# EAGLE board UV - SERVO_CTRL - Copy (2) (EAGLE 6.3)
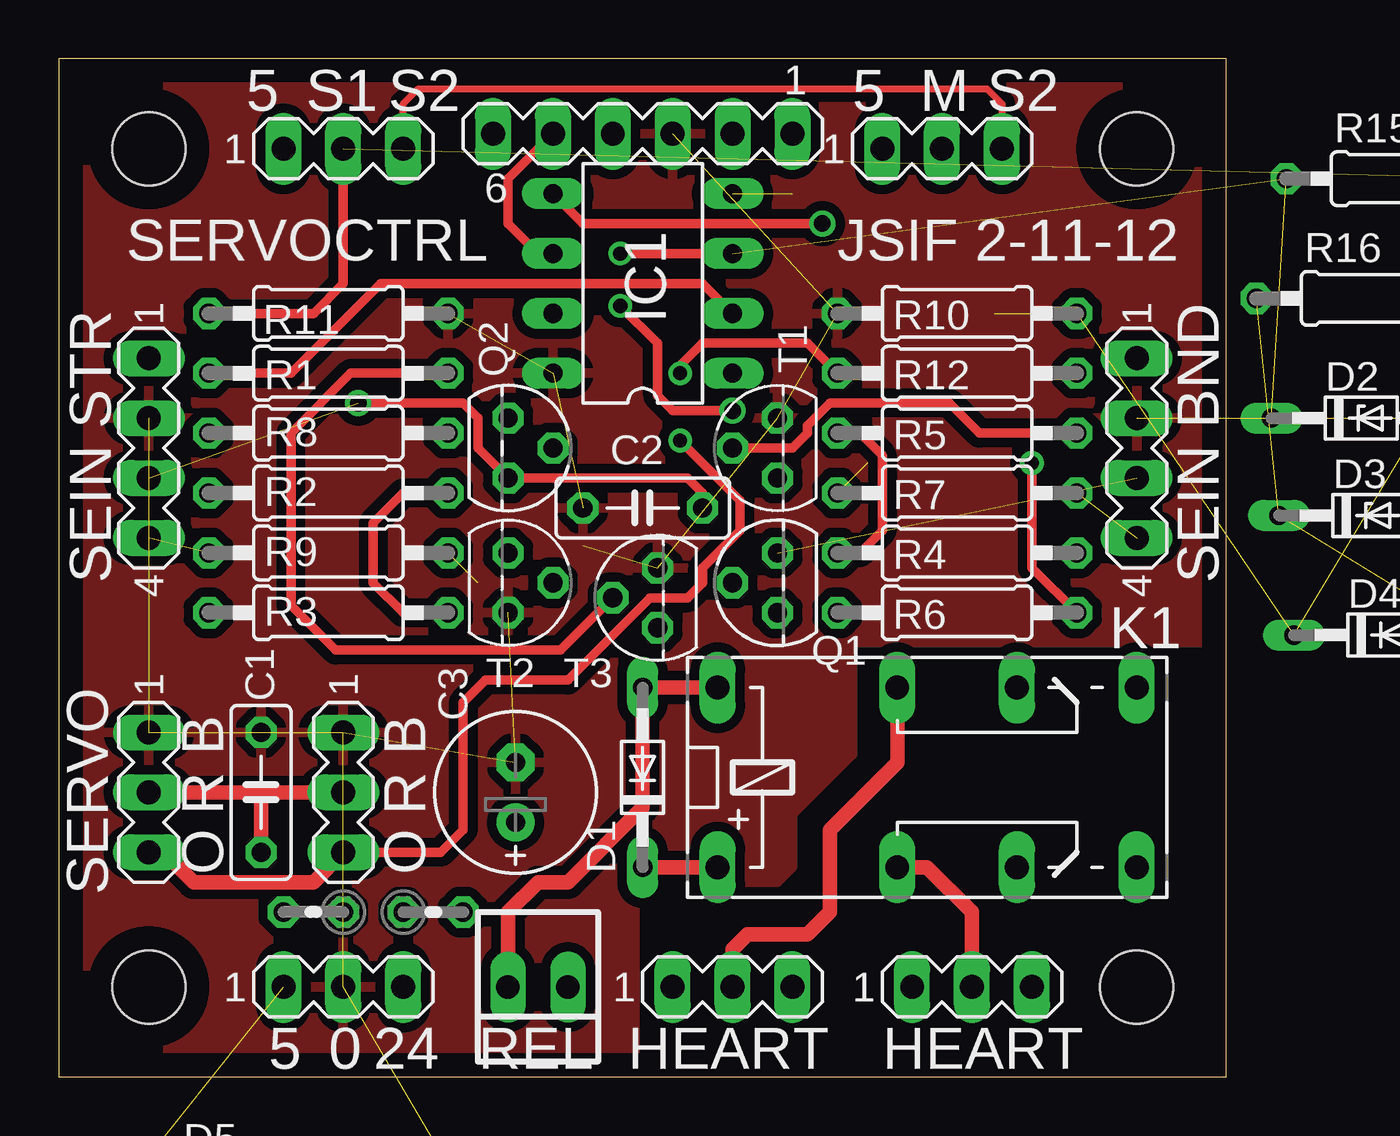
[diagram p0: board, top side]
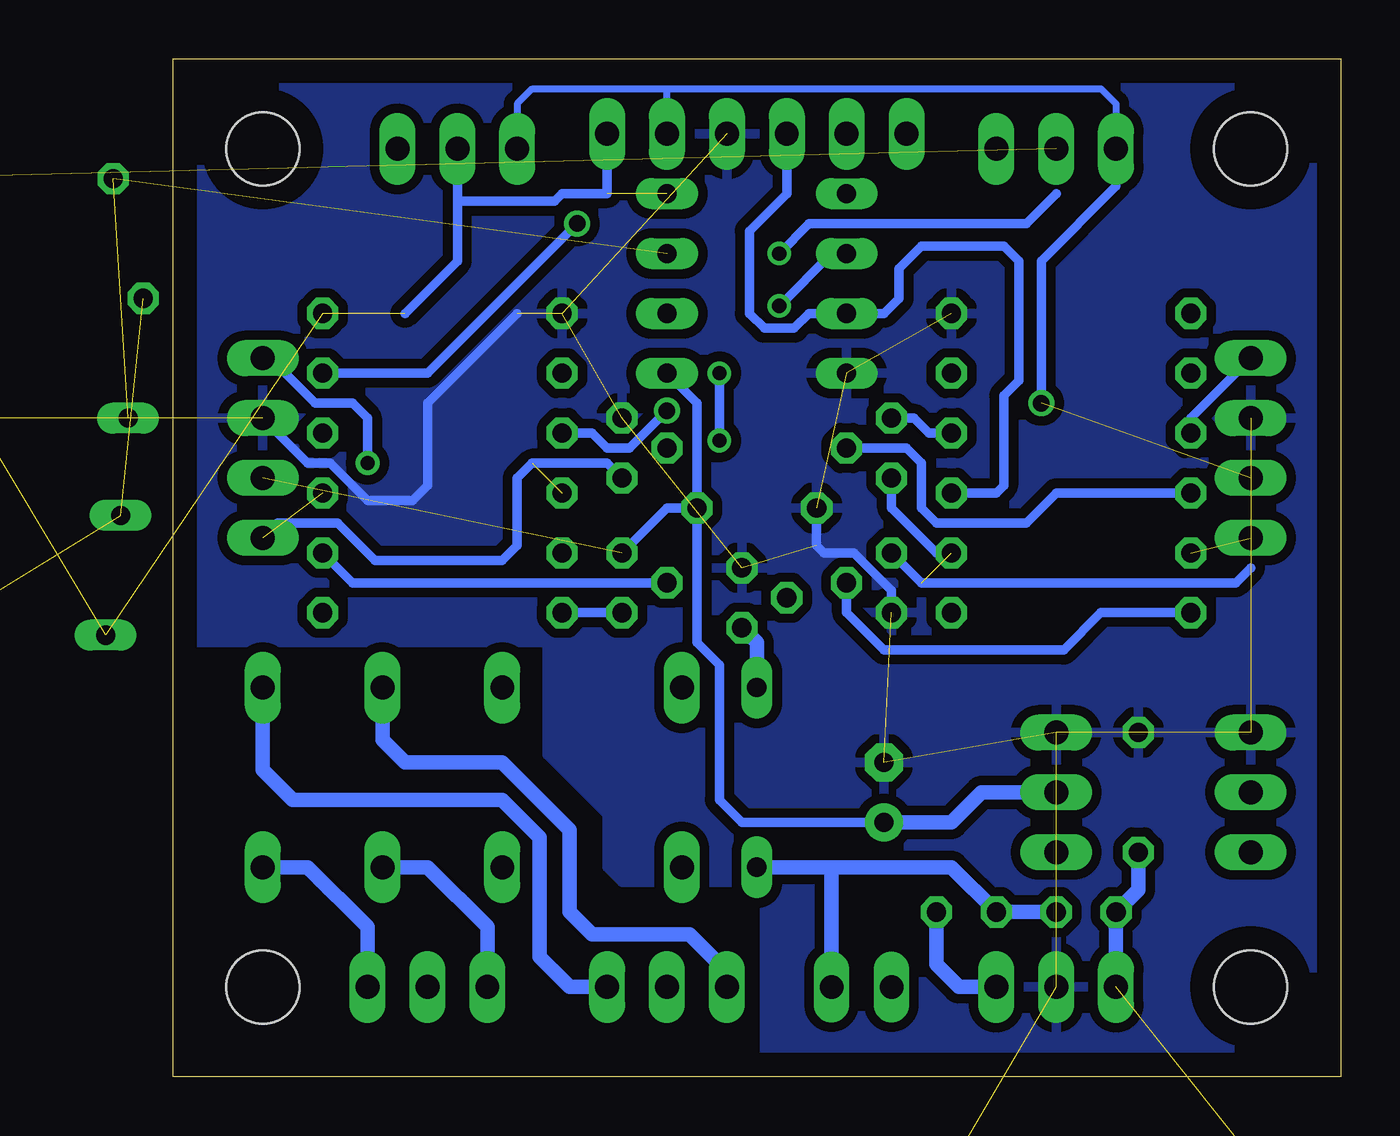
[diagram p1: board, bottom side, seen from below]

Size 49.53 x 43.18 mm. Coordinates in mm from the lower left corner, seen from the top.
Outline: 0,0 49.53,0 49.53,43.18 0,43.18 0,0
Copper layers (1*16): Top 0.035mm / dielectric 1.5mm / Bottom 0.035mm
Design rules "default *": minimum track width 10mil, minimum drill 20mil, track to track 8mil, track to pad 8mil, pad to pad 8mil, via to via 8mil, smd to smd 8mil, copper to edge 40mil, drill to drill 8mil, minimum pad ring 10mil, minimum via ring 8mil, stop-mask expansion 4mil, vias tented up to drill 0mil, thermal gap 16mil
Holes 3.1 mm at 3.81,3.81 45.72,3.81 3.81,39.37 45.72,39.37

## Footprints (pad centres in the part's own frame; a part is rotated, then mirrored left to right if it is on the bottom)
C050-025X075 = drill 0.813 octagon: 1 -2.54,0; 2 2.54,0
E2,5-7 = drill 0.813 pad 1.6: + -1.27,0 | drill 0.813 pad 1.6 octagon: - 1.27,0
DO34-7 = drill 0.813 long: A 3.81,0; C -3.81,0
DO34Z7 = drill 0.813 long: A 3.81,0; C -3.81,0
C1702-15 = drill 1.397 long: A 7.62,0; C -7.62,0
DIL8 = drill 0.813 long: 1 -3.81,-3.81; 2 -1.27,-3.81; 3 1.27,-3.81; 4 3.81,-3.81; 5 3.81,3.81; 6 1.27,3.81; 7 -1.27,3.81; 8 -3.81,3.81
G6A-234P = drill 1.016 long: 1 -3.81,-3.81; 16 -3.81,3.81; O1 8.89,-3.81; O2 8.89,3.81; P1 3.81,-3.81; P2 3.81,3.81; S1 13.97,-3.81; S2 13.97,3.81
TO92 = drill 0.813 octagon: 1 1.27,0; 2 0,1.905; 3 -1.27,0
0207/10 = drill 0.813 octagon: 1 -5.08,0; 2 5.08,0
0204V = drill 0.813 octagon: 1 -1.27,0; 2 1.27,0
MA03-1 = drill 1.016 long: 1 -2.54,0; 2 0,0; 3 2.54,0
MA06-1 = drill 1.016 long: 1 -6.35,0; 2 -3.81,0; 3 -1.27,0; 4 1.27,0; 5 3.81,0; 6 6.35,0
MA04-1 = drill 1.016 long: 1 -3.81,0; 2 -1.27,0; 3 1.27,0; 4 3.81,0
22-23-2021 = drill 1 long: 1 -1.27,0; 2 1.27,0

## Placement (x,y rotation side)
C1  220Nf  [C050-025X075]  8.57,12.06 90 top
C2  220nF  [C050-025X075]  24.77,24.13 180 top
C3  100uF  [E2,5-7]  19.37,12.06 90 top
D1  BAT85  [DO34-7]  24.77,12.7 90 top
D2  5V1  [DO34Z7]  55.24,27.94 0 top
D3  5V1  [DO34Z7]  55.56,23.81 0 top
D4  bat85  [DO34-7]  56.2,18.73 0 top
D5  5V6  [C1702-15]  9.84,-5.4 0 top  (outside the outline)
IC1  PIC12F675P  [DIL8]  24.77,33.66 90 top
K1  G6A-234P  [G6A-234P]  31.75,12.7 0 top
Q1  BC557  [TO92]  30.48,20.95 90 top
Q2  BC557  [TO92]  19.05,26.67 270 top
R1  4K7  [0207/10]  11.43,29.84 0 top
R2  4K7  [0207/10]  11.43,24.77 180 top
R3  4K7  [0207/10]  11.43,19.68 180 top
R4  4K7  [0207/10]  38.1,22.23 0 top
R5  4K7  [0207/10]  38.1,27.3 0 top
R6  150E  [0207/10]  38.1,19.68 0 top
R7  150E  [0207/10]  38.1,24.77 0 top
R8  150E  [0207/10]  11.43,27.3 180 top
R9  150E  [0207/10]  11.43,22.23 180 top
R10  1K  [0207/10]  38.1,32.38 0 top
R11  1K  [0207/10]  11.43,32.38 180 top
R12  220E  [0207/10]  38.1,29.84 0 top
R13  0E  [0204V]  10.79,6.99 180 top
R14  0E  [0204V]  15.88,6.99 0 top
R15  1K  [0207/10]  57.15,38.1 0 top
R16  1K  [0207/10]  55.88,33.02 0 top
SV1  Supply  [MA03-1]  12.06,3.81 0 top
SV2  Switch_Input  [MA03-1]  12.06,39.37 0 top
SV3  Select_Jumper  [MA03-1]  37.47,39.37 0 top
SV4  ICSP  [MA06-1]  24.77,40.01 180 top
SV5  Sein_Straight  [MA04-1]  3.81,26.67 270 top
SV6  Sein_Bend  [MA04-1]  45.72,26.67 270 top
SV7  Servo_Out  [MA03-1]  12.06,12.06 270 top
SV8  Heart_Pol1  [MA03-1]  38.73,3.81 0 top
SV9  Heart_Pol2  [MA03-1]  28.57,3.81 0 top
SV10  Servo_Out2  [MA03-1]  3.81,12.06 270 top
T1  BC547  [TO92]  30.48,26.67 90 top
T2  BC547  [TO92]  19.05,20.95 270 top
T3  BC547  [TO92]  25.4,20.32 90 top
X1  22-23-2021  [22-23-2021]  20.32,3.81 180 top

## Library data of the parts
C1-C3 R1-R16 = rcl
D1-D5 = diode
IC1 = microchip; MF: MICROCHIP; MPN: PIC12F675-E/P; OC_FARNELL: 9759018; OC_NEWARK: 92C4340
K1 = relay; OC_FARNELL: unknown; OC_NEWARK: unknown
Q1 Q2 = transistor-pnp
SV1-SV10 = con-lstb; OC_FARNELL: unknown; OC_NEWARK: unknown
T1-T3 = transistor
X1 = con-molex; MF: MOLEX; MPN: 22-23-2021; OC_FARNELL: 1462926; OC_NEWARK: 25C3832

## Nets
0V: C1.2 C2.2 C3.- D2.A D3.A D5.A IC1.8 R10.1 R11.1 SV1.2 SV4.3 SV5.2 SV6.2 SV7.1 SV10.1 T1.1 T2.1 T3.1
+5V: C1.1 C2.1 C3.+ D5.C IC1.1 Q1.1 Q2.1 R13.2 SV1.1 SV2.1 SV3.1 SV4.2 SV5.3 SV6.3 SV7.2 SV10.2
+24V: R14.2 SV1.3
HEART_POL: IC1.2 R1.1
ICSPCLK: IC1.6 R4.1 R5.1 SV4.5
ICSPDAT: IC1.7 R2.1 R3.1 SV4.4
N$1: D2.C IC1.3 R15.1
N$2: K1.O1 SV8.1
N$3: SV2.3 SV3.3
N$4: K1.S1 SV8.3
N$5: K1.P1 SV8.2
N$6: K1.O2 SV9.1
N$7: K1.S2 SV9.3
N$8: K1.P2 SV9.2
N$9: IC1.5 R12.2
N$10: R1.2 T3.2
N$11: D1.C K1.1 R13.1 R14.1 X1.1
N$12: D1.A K1.16 T3.3 X1.2
N$13: Q1.2 R4.2
N$14: R6.2 SV6.1
N$15: Q1.3 R6.1
N$16: R5.2 T1.2
N$17: R11.2 R15.2 SV2.2
N$18: R7.1 T1.3
N$19: R7.2 SV6.4
N$20: Q2.2 R2.2
N$21: Q2.3 R8.1
N$22: R8.2 SV5.1
N$23: R9.2 SV5.4
N$24: R9.1 T2.3
N$25: R3.2 T2.2
N$26: D3.C D4.A R16.1
SERVO_OUT: R12.1 SV7.3 SV10.3
VPP: D4.C IC1.4 R10.2 R16.2 SV3.2 SV4.1

## Tracks (layer width: path | path; a pad name or v marks a point on that pad's centre or on a via)
0V  (16 unrouted)
  Bottom 0.406: T2.1 19.05,20.64 20.64,22.23 21.91,22.23 22.23,22.54 C2.2 | SV6.2 43.81,26.04 42.86,26.04 41.27,24.45 39.37,24.45 38.73,25.08 38.73,28.57 34.92,32.38
  pour Bottom (isolate 0.406): 0,43.18 0,0 24.45,0 24.45,8.26 30.48,8.26 31.11,8.89 31.11,11.11 33.66,13.65 33.66,18.41 49.53,18.41 49.53,43.18
  pour Top (isolate 0.406): 0,0 0,43.18 49.53,43.18 49.53,18.41 33.66,18.41 33.66,13.65 31.11,11.11 31.11,8.89 30.48,8.26 24.45,8.26 24.45,0
+5V  (via drill 0.7)  (3 unrouted)
  Top 0.406: C2.1 27.3,24.77 26.67,25.4 Q2.1 17.78,26.67 17.78,27.94 17.14,28.57 v12.7,28.57
  Top 0.61: SV10.2 8.57,12.06 | 8.57,12.06 SV7.2 | C1.1 8.57,12.06
  Bottom 0.305: SV3.1 34.92,41.27 34.29,41.91 28.57,41.91 | 28.57,41.91 10.16,41.91 9.53,41.27 SV2.1 | SV4.2 28.57,41.91
  Bottom 0.406: C2.1 27.3,18.41 26.35,17.46 26.35,11.75 25.4,10.79 C3.+ | C2.1 27.3,28.57 IC1.1 | Q1.1 28.57,24.13 C2.1 | 17.14,22.23 19.05,24.13 Q2.1 | v12.7,28.57 12.7,34.61 9.53,37.78 SV2.1
  Bottom 0.61: SV1.1 R13.2 8.57,7.94 C1.1 | C3.+ 16.51,10.79 15.24,12.06 SV7.2
+24V
  Bottom 0.61: R14.2 17.14,4.76 16.19,3.81 SV1.3
HEART_POL
  Top 0.406: R1.1 9.84,29.84 13.65,33.66 27.3,33.66 IC1.2
ICSPCLK  (via drill 0.6 pad 0.25, 0.7)
  Top 0.406: R5.1 33.97,27.3 34.92,26.35 34.92,23.18 33.97,22.23 R4.1 | v28.57,28.26 26.04,28.26 25.4,28.89 25.4,31.11 v23.81,32.7 | IC1.6 20.32,34.92 19.05,36.2 19.05,38.1 SV4.5
  Bottom 0.406: R5.1 31.75,27.3 31.11,26.67 30.16,26.67 v28.57,28.26 | v23.81,32.7 21.59,34.92 IC1.6
ICSPDAT
  Top 0.406: R2.1 14.61,24.77 13.34,23.5 13.34,20.95 14.61,19.68 R3.1
  Bottom 0.406: R2.1 14.61,24.77 14.29,25.08 14.29,28.89 13.65,29.53 13.65,34.61 14.29,35.24 17.78,35.24 18.73,34.29 18.73,33.02 19.37,32.38 IC1.7 22.54,32.38 23.18,31.75 24.45,31.75 25.08,32.38 25.08,35.88 23.5,37.47 SV4.4
N$1  (via drill 0.6 pad 0.25)  (2 unrouted)
  Top 0.406: v23.81,34.92 IC1.3
  Bottom 0.406: 12.06,37.47 13.34,36.2 22.54,36.2 v23.81,34.92
N$2
  Bottom 0.61: SV8.1 36.2,6.35 38.73,8.89 K1.O1
N$3
  Top 0.305: SV2.3 14.61,41.27 15.24,41.91 39.37,41.91 40.01,41.27 SV3.3
N$4
  Bottom 0.61: SV8.3 41.27,6.35 43.81,8.89 K1.S1
N$5
  Top 0.61: K1.P1 36.83,8.89 38.73,6.99 SV8.2
N$6
  Bottom 0.61: SV9.1 26.04,4.45 27.62,6.03 31.75,6.03 32.7,6.99 32.7,10.48 35.56,13.34 39.69,13.34 40.64,14.29 K1.O2
N$7
  Bottom 0.61: SV9.3 32.7,3.81 33.97,5.08 33.97,10.16 35.56,11.75 44.45,11.75 45.72,13.02 K1.S2
N$8
  Top 0.61: SV9.2 28.57,5.4 29.21,6.03 31.75,6.03 32.7,6.99 32.7,10.48 35.56,13.34 K1.P2
N$9  (via drill 0.7)
  Top 0.406: v32.38,36.2 22.23,36.2 IC1.5
  Bottom 0.406: R12.2 38.73,29.84 v32.38,36.2
N$10
  Top 0.406: T3.2 21.27,18.1 11.75,18.1 9.84,20 9.84,27.3 12.38,29.84 R1.2
N$11
  Top 0.61: K1.1 D1.C
  Bottom 0.61: X1.1 21.59,8.89 | 21.59,8.89 D1.C | 21.59,8.89 16.51,8.89 R14.1 R13.1
N$12
  Top 0.61: X1.2 19.05,6.99 20.32,8.26 21.59,8.26 24.77,11.43 D1.A K1.16
  Bottom 0.61: T3.3 24.77,18.41 D1.A
N$13
  Bottom 0.406: Q1.2 41.91,20.95 R4.2
N$14  (via drill 0.6)
  Top 0.406: R6.2 41.27,21.59 v41.27,26.04
  Bottom 0.406: SV6.1 45.4,30.48 43.5,28.57 41.91,28.57 41.27,27.94 v41.27,26.04
N$15
  Bottom 0.406: R6.1 Q1.3
N$16
  Top 0.406: R5.2 39.05,27.3 37.78,28.57 32.7,28.57 31.75,27.62 31.75,27.3 31.11,26.67 T1.2
N$17  (1 unrouted)
  Top 0.406: R11.2 10.79,32.38 12.06,33.66 SV2.2
N$18  (1 unrouted)
  Bottom 0.406: T1.3 31.11,26.04 34.29,26.04 34.92,25.4 34.92,22.54 35.56,21.91 40.96,21.91 42.55,23.5 45.09,23.5
N$19  (1 unrouted)
N$20
  Bottom 0.406: R2.2 12.06,24.77 13.34,23.5 17.14,23.5 17.78,24.13 17.78,26.04 18.41,26.67 Q2.2
N$21
  Bottom 0.406: R8.1 17.46,27.3 18.1,27.94 Q2.3
N$22
  Bottom 0.406: SV5.1 6.35,27.94 R8.2
N$23  (1 unrouted)
N$24  (1 unrouted)
  Bottom 0.406: 3.81,21.59 4.45,20.95 17.78,20.95 T2.3
N$25
  Bottom 0.406: R3.2 10.16,19.68 11.75,18.1 19.37,18.1 20.95,19.68 T2.2
N$26  (2 unrouted)
SERVO_OUT  (via drill 0.6 pad 0.25)
  Top 0.406: SV7.3 16.19,9.53 17.14,10.48 17.14,15.88 18.1,16.83 21.59,16.83 25.08,20.32 26.67,20.32 27.3,20.95 27.3,21.59 28.89,23.18 28.89,24.45 v26.35,26.99 | v26.35,29.84 26.35,30.16 27.3,31.11 31.75,31.11 R12.1
  Top 0.61: SV10.3 4.45,9.53 5.71,8.26 10.79,8.26 SV7.3
  Bottom 0.406: v26.35,26.99 v26.35,29.84
VPP  (4 unrouted)
  Bottom 0.406: 39.69,32.38 37.47,34.61 37.47,37.15 | SV4.1 31.11,37.47 33.02,37.47 33.34,37.15 37.47,37.15 | 37.47,37.15 SV3.2

## Text on the board
tNames: 5 | S1 | S2 | 5 | M | S2 | SERVOCTRL | JSIF 2-11-12 | SEIN STR | SEIN BND | SERVO | B | B | R | R | O | O | 5 | 0 | 24 | REL | HEART | HEART